# Altium PCB Arduino MEGA blank shield.pcbdoc
Units mil, origin at the board's own origin, x right, y up, seen from the top; angles counter-clockwise.
Board outline 2320 x 2100 mil, 2 copper layers (Top Layer, Bottom Layer); 27 components, 25 nets, 104 pads, 3 vias.
Unrouted connection lines stored in the file: 1.
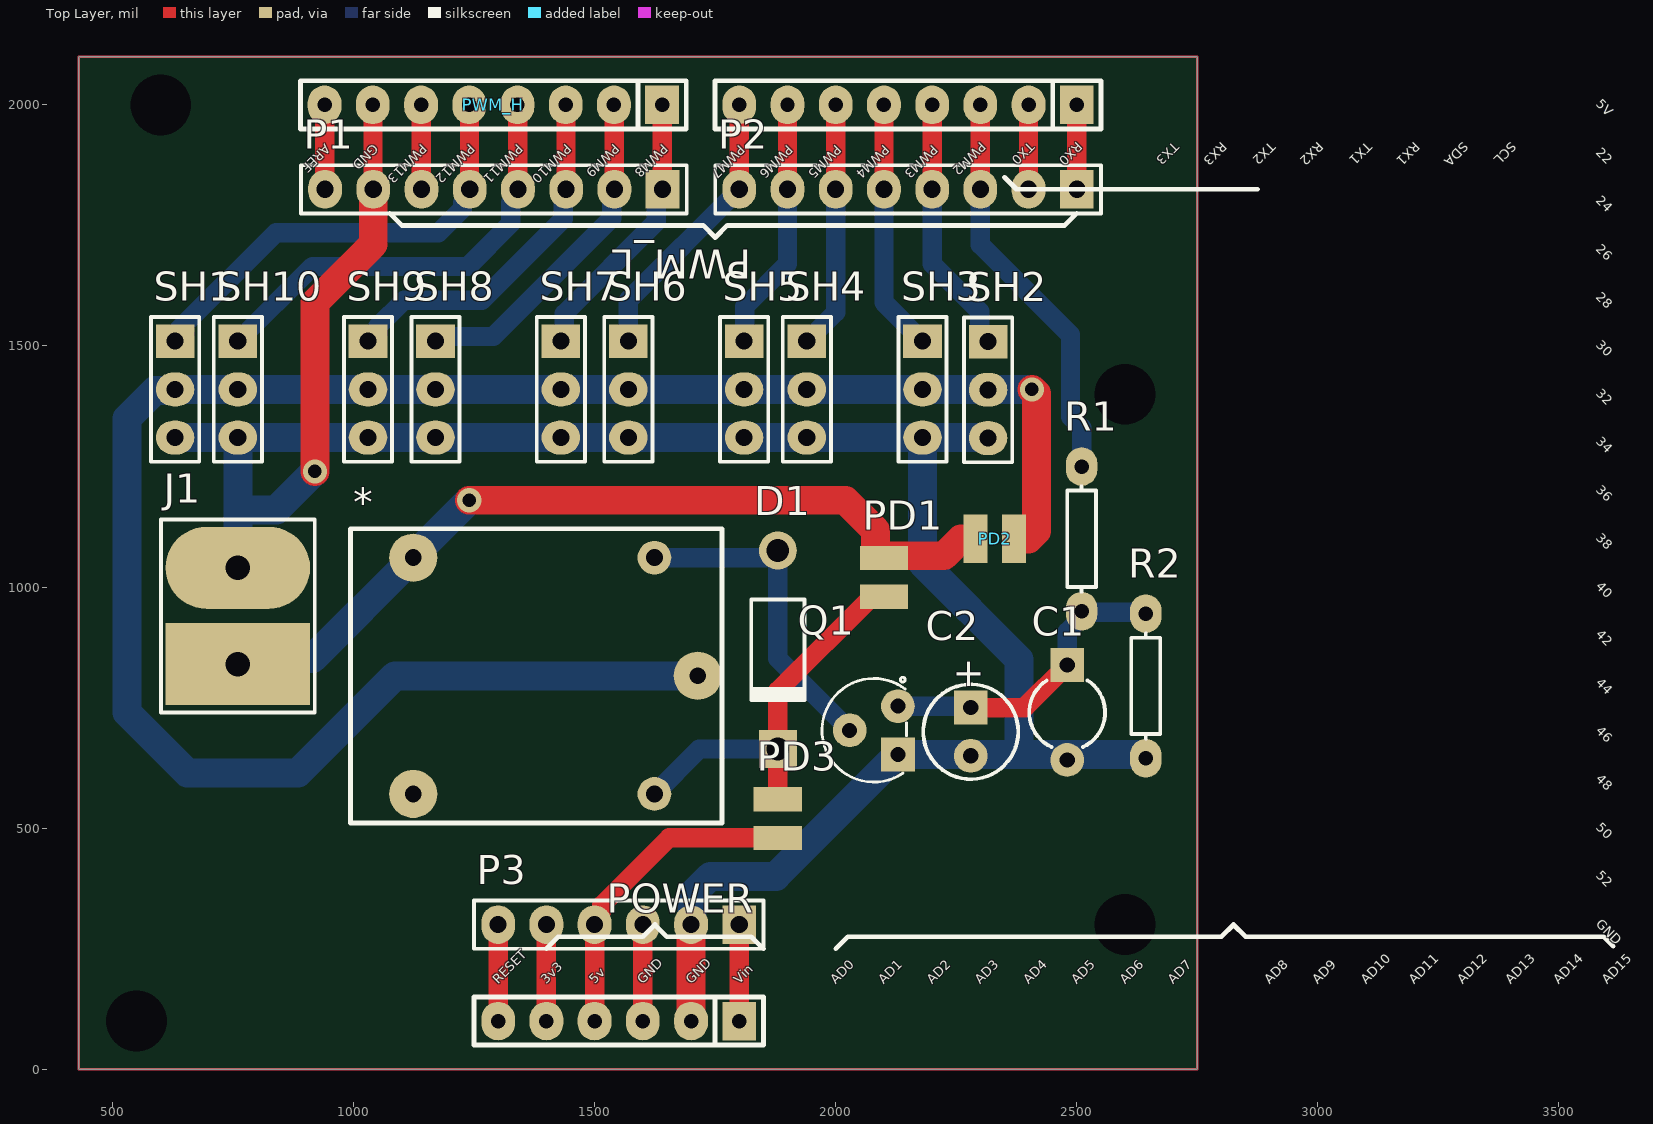
[diagram p0: Top Layer view]
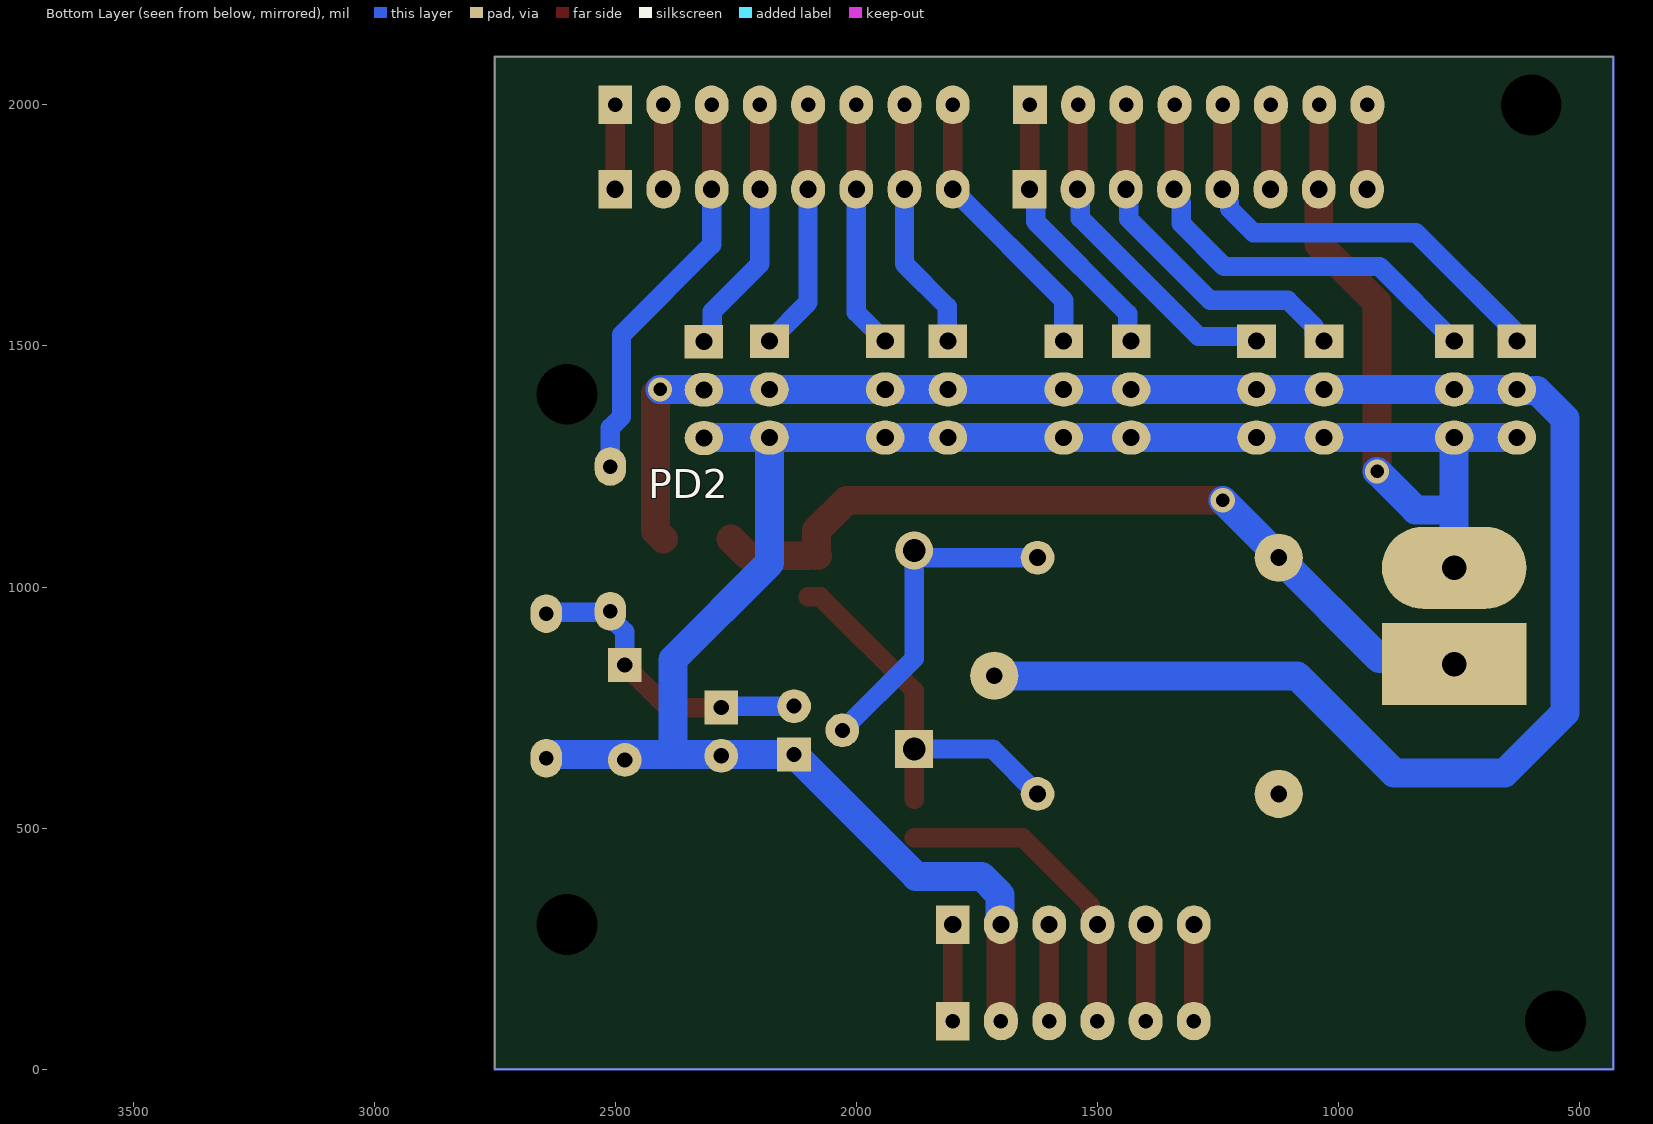
[diagram p1: Bottom Layer view, seen from below]

## Layer stack, top to bottom
Top Solder: solder mask 0.4, Solder Resist, Dk 3.5
Top Layer: signal copper 1.4
Dielectric1: dielectric 12.6, FR-4, Dk 4.8
Bottom Layer: signal copper 1.4
Bottom Solder: solder mask 0.4, Solder Resist, Dk 3.5

## Board outline
430,0 430,2100 2750,2100 2750,0

## Design rules (kind name [scope] priority, off if disabled: settings)
Clearance [All] p1: gap=10 ignorepadtopadclearanceinfootprint=FALSE except(0: Arc-Hole Track-Hole SMDPad-Hole THPad-Hole Via-Hole Fill-Hole Poly-Hole Region-Hole Text-Hole; 30: Arc-Arc Arc-Track Arc-SMDPad Arc-THPad Arc-Via Track-Track Track-SMDPad Track-THPad Track-Via SMDPad-SMDPad SMDPad-THPad SMDPad-Via THPad-THPad THPad-Via Via-Via)
PolygonConnect [All] p1: connectstyle=Relief reliefconductorwidth=10 reliefentries=4 polygonreliefangle="90 Angle" airgapwidth=10
RoomDefinition AdruinoMegaSheild [InComponentClass('AdruinoMegaSheild')] p1: confinementstyle=ConfineOut formatcopy=TRUE lockcomponents=FALSE outline 4200,900 4750,900 4750,1080 4200,1080
RoutingVias [All] p1: holewidth=28 width=50 viastyle="Through Hole" minholewidth=28 minwidth=50 maxholewidth=28 maxwidth=50
SilkToSolderMaskClearance SilkscreenOverComponentPads [IsPad] p1: minsilkscreentomaskgap=10 clearancetoexposedcopper=TRUE
SolderMaskExpansion [All] p1: expansion=4 istentingtop=FALSE
Width Width_PWR [InNet('GND') or InNet('VCC') or InNet('VCC_IN')] p1: maxlimit=70 minlimit=40 preferedwidth=60 minimp=50.000000 maximp=50.000000 favimp=50.000000
Width [All] p2: maxlimit=50 minlimit=30 preferedwidth=40 minimp=50.000000 maximp=50.000000 favimp=50.000000
29 further rules are at their usual default settings.

## Components (designator, comment, footprint, x,y, rotation, side; value= is the part's Value field where it differs from the comment)
* "Relay" Relay 1124,1061 r270 top
C1 "Cap2" CAP2 2480,740 r270 top value=100nF
C2 "Cap1" CAP1 2280,700 r270 top value=10uF
D1 "Diode 1N4007" 1N4007 1880,870 r270 top
J1 "1729128" PHOE-1729128-2_V 760,940 r90 top
P1 "Header 8" HDR1X8 1641,1825 r180 top
P2 "Header 8" HDR1X8 2500,1825 r180 top
P3 "Header 6" HDR1X6 1800,300 r180 top
PD1 "Pad2" PAD2#1 2100,980 r90 top
PD2 "Pad2" PAD2#2 2370,1100 r180 bottom
PD3 "Pad2" PAD2#1 1880,480 r90 top
POWER "POWER" "Header 6x1 8.5mm" 1800,100 r180 top locked
PWM_H "PWM_H" "Header 8x1 8.5mm" 1640,2000 r180 top locked
PWM_L "PWM_L" "Header 8x1 8.5mm" 2500,2000 r180 top locked
Q1 "C828" TO-92_ONS 2129,653 r90 top
R1 "Res1" RES 2510,1100 r270 top value=1K
R2 "Res1" RES 2643,795 r90 top value=10K
SH1 "Header 3" HDR1X3 630,1510 r270 top
SH2 "Header 3" HDR1X3 2316,1509 r270 top
SH3 "Header 3" HDR1X3 2180,1510 r270 top
SH4 "Header 3" HDR1X3 1940,1510 r270 top
SH5 "Header 3" HDR1X3 1810,1510 r270 top
SH6 "Header 3" HDR1X3 1570,1510 r270 top
SH7 "Header 3" HDR1X3 1430,1510 r270 top
SH8 "Header 3" HDR1X3 1170,1510 r270 top
SH9 "Header 3" HDR1X3 1030,1510 r270 top
SH10 "Header 3" HDR1X3 760,1510 r270 top

## Footprints (in the part's own frame and the unit in brackets; to place one, negate y for a bottom-side part, rotate by r counter-clockwise, add the part's x,y. Pads: shape width x height; smd on the part's side, far side on the other; paste and mask are expansions set on the pad)
1N4007 [mm] "Diode, Axial; Body 5.2 x 2.7 mm (LxDia. max), Lead Dia. 0.86 mm (max)"
  round 2 hole 1.2: 1(-5.23,0)
  rect 2x2 hole 1.2: 2(5.23,0)
  silkscreen extent -2.65,-1.4 2.75,1.4, body extent -5.59,-1 5.58,1, height 2.02
CAP1 [mil] "THD, 2-Leads, Dia 5mm, Body Length 11mm"
  rect 70x70 hole 31.5: 1(-50,0)
  round 70 hole 31.5: 2(50,0)
  silkscreen extent -98,-98 98,98, body extent -81,-81 81,81, height 319
CAP2 [mil] "Capacitor; 2 Leads"
  rect 70x70 hole 31.5: 1(-98.43,0)
  round 70 hole 31.5: 2(98.43,0)
  silkscreen extent -66,-79 72,79, body extent -81,-81 81,81, height 319
HDR1X3 [mil] "Connector; Header; 3 Position"
  rect 70x80 hole 35.43: 1(0,0)
  oval 70x80 hole 35.43: 2(100,0) 3(200,0)
  silkscreen extent -50,-50 250,50
HDR1X6 [mil] "Connector; Header; 6 Position"
  rect 70x80 hole 35.43: 1(0,0)
  oval 70x80 hole 35.43: 2(100,0) 3(200,0) 4(300,0) 5(400,0) 6(500,0)
  silkscreen extent -50,-50 550,50
HDR1X8 [mil] "Connector; Header; 8 Position"
  rect 70x80 hole 35.43: 1(0,0)
  oval 70x80 hole 35.43: 2(100,0) 3(200,0) 4(300,0) 5(400,0) 6(500,0) 7(600,0) 8(700,0)
  silkscreen extent -50,-50 750,50
"Header 6x1 8.5mm" [mil] "Stackable 6 pin header"
  rect 70x80 hole 30: 1(0,0)
  oval 70x80 hole 30: 2(100,0) 3(200,0) 4(300,0) 5(400,0) 6(500,0)
  silkscreen extent -50,-50 550,50, body extent -50,-50 550,50, height 335
"Header 8x1 8.5mm" [mil] "Stackable 8 pin header"
  rect 70x80 hole 30: 1(0,0)
  oval 70x80 hole 30: 2(100,0) 3(200,0) 4(300,0) 5(400,0) 6(500,0) 7(600,0) 8(700,0)
  silkscreen extent -50,-50 750,50, body extent -50,-50 750,50, height 335
PAD2#1 [mil]
  rect 50x100 smd: 1(0,0) 2(80,0)
PAD2#2 [mil]
  rect 50x100 smd far side: 1(0,0) 2(80,0)
PHOE-1729128-2_V [mil] "Receptacle, 2-Leads, Body 8.1x10.16mm, Pitch 5.08mm"
  rect 170x300 hole 51.18: 1(-100,0)
  oval 170x300 hole 51.18: 2(100,0)
  silkscreen extent -200,-159 200,159, body extent -222,-159 200,159, height 394
Relay [mil]
  round 100 hole 35: 1(245,590) 2(490,0) 3(0,0)
  round 70 hole 35: 4(0,500) 5(490,500)
  silkscreen extent -60,-130 550,640, body extent -60,-125 550,635, height 600
RES [mil] "Axial Device, Thru-Hole; 2 Leads; 0.3 in Pin Spacing"
  oval 80x65 hole 30: 1(-150,0) 2(150,0)
  silkscreen extent -109,-30 109,30, body extent -161,-46 161,46, height 96
TO-92_ONS [mil]
  rect 70x70 / inner rect 51x51 / far side rect 70x70 hole 31 mask+0: 1(0,0)
  round 70 / inner round 51 / far side round 70 hole 31 mask+0: 2(50,100) 3(100,0)
  silkscreen extent -57,-17 160,157, body extent -52,-11 152,153, height 300

## Part data
C1 C2: "Capacitor", PackageDescription="Capacitor; 2 Leads", PackageReference=CAPR5-4X5, Published=23-Sep-2002, Publisher="Altium Limited"
D1: "1 Amp General Purpose Rectifier", Code_JEDEC=DO-204-AL, ComponentLink1Description="Manufacturer Link", ComponentLink1URL=http://www.fairchildsemi.com/, ComponentLink2Description=Datasheet, ComponentLink2URL=http://www.fairchildsemi.com/ds/1N%2F1N4001.pdf, DatasheetVersion=1998, LatestRevisionDate=17-Jul-2002, LatestRevisionNote="Re-released for DXP Platform.", PackageDescription="Diode, Axial; Body 5.2 x 2.7 mm (LxDia. max), Lead Dia. 0.86 mm (max)", PackageReference=DO-41, PackageVersion=Aug-1999, Published=8-Jun-2000, Publisher="Altium Limited"
J1: library part CMP-2000-05815-1, "PCB Terminal Block, 13.5 A, 400 V, 2-Pin THD, RoHS, Bulk", Current Rating=13500mA, Manufacturer="Phoenix Contact", Package Description="2-Pin Through Hole Device, Body 8.1 x 10.16 mm, Pitch 5.08 mm", Package Reference=1729128-2, Package Version=03/2015, Voltage Rating=400V, Datasheet URL=https://datasheet.ciiva.com/16046/1729128-16046181.pdf, Datasheet Version=12/2013, Manufacturer URL=http://www.phoenixcontact.com/, Mounting Technology=ThroughHole, No. of Positions=2, No. of Rows=1, Orientation=Horizontal, Package URL=https://www.phoenixcontact.com/online/portal/pi/pxc/product_detail_page/!ut/p/b1/3VdJjqNKFDxLH8AFycySyWY2ozFsEPOMMQaDOX1XedGL_1Vdm5YXJleknhSKeBkvI6EA8ncAo3AYoDhBQGco6KN7VURTdemj9us_IEKEZo_YHiPAEWEFmDGOHMORkqKYCORBZxgL7ZoaZYcbFFUZ3fqxSY6GOuxydWUuHqz1ynmMFygu583Bob0Ewr6Sd_l-5m-kAueHiB0jpRwZwe58wwtkpxtMYd_LmGcDRU02dRNEyWt6Y2ti5pSyJ_reIkzIulrqApdnbT11V5jnCKbYNCvhEM1MCpPByat_X379-iThf08CI5GfOPqfBeS3BRoBOdD55AKVv0iLwCMq-2BrzXWSGRH7pUGD9uwXQjiph3xL0DKQwdGa0JImiIOmBNOestqgwTHSSs2oOep-78apyXQBvNi8ZLaFjvjWvcaUEBu0MC6Wbe-d6mB0FAebo2lUWinqYaZs5DAYzV0RP9yitUjnGJ0iI9xhZkT42OCQNUJJhkgWINNQLP2JFP6OpMg3JCVg70jqHT0lvKOnhHf0lPuOnnLf0VPuWx6_dxwUIvwk5WMkT0kLL1mh61l2yZVSzG3pYV_bqo-mj6uMKwKwdnnW8Jh5RTOJzMOA5c-eJDaZQw4mTMPH02PvS_ZAqNVjVTo2WyYLkwH_KU1mmmG5kjRhDqPXLwwVHvVOjCM60-fpXvTDfMGW1PVFVS1r4e4yVDk4ZdNbkUHvqPqQSeian4UD39fNKmachqdJ1NJbyk8rXT9mXTvPk3oE5meulKGgiruPJek-4I9hTT6G8ZLOyRSm2RRVbThERQad5OS28hdt4YW4vG0stgYYzsWsK4_7y6DZMjJSCqri1kyiZR5vD7pwIrNR7QwPHTcLTI5qT7eRlpHrdGiupYlqQDJ7zy_CND8fWWBoLRXxk1RVcXiBQwbTD4Xi7KL-FuO94t9xaqweXzH, Packing=Bulk, PartNumber=1729128, Pitch=5.08mm, RoHS=TRUE
P1 P2: "Header, 8-Pin", LatestRevisionDate=17-Jul-2002, LatestRevisionNote="Re-released for DXP Platform.", Publisher="Altium Limited"
P3: "Header, 6-Pin", LatestRevisionDate=17-Jul-2002, LatestRevisionNote="Re-released for DXP Platform.", Publisher="Altium Limited"
PD1 PD2 PD3: "Square Pad", h=10mil
POWER: Supplier Part Number 1=52553843, Supplier 1=Arrow, Supplier 2=Arrow, Supplier 3=Digi-Key, Supplier 4=Arrow, Supplier 5=Arrow, Supplier Part Number 2=2699075, Supplier Part Number 3=SAM1198-06-ND, Supplier Part Number 4=2699089, Supplier Part Number 5=2699088
PWM_H: Supplier Part Number 1=SAM1198-08-ND, Supplier 1=Digi-Key, Supplier 2=Arrow, Supplier 3=Arrow, Supplier 4=Arrow, Supplier Part Number 2=2698940, Supplier Part Number 3=2698939, Supplier Part Number 4=2698925
PWM_L: Supplier Part Number 1=2698940, Supplier 1=Arrow, Supplier 2=Arrow, Supplier 3=Digi-Key, Supplier 4=Arrow, Supplier Part Number 2=2698939, Supplier Part Number 3=SAM1198-08-ND, Supplier Part Number 4=2698925
Q1: "NPN General Purpose Transistor", ComponentLink1Description="Manufacturer Link", ComponentLink1URL=http://www.fairchildsemi.com/, ComponentLink2Description=Datasheet, ComponentLink2URL=http://www.fairchildsemi.com/ds/2N%2F2N3904.pdf, DatasheetVersion=1997, LatestRevisionDate=15-Jan-2003, LatestRevisionNote="PCB Footprint 'BCY-W3/D4.7' replaced", PackageDescription="TO, Flat Index; 3 In-Line, Axial Leads; Body Dia. 4.5mm; Leads 0.51 x 0.48 mm (max)", PackageReference=TO-92A, PackageVersion=Sep-1998, Published=8-Jun-2000, Publisher="Altium Limited"
R1 R2: "Resistor", LatestRevisionDate=17-Jul-2002, LatestRevisionNote="Re-released for DXP Platform.", PackageDescription="Axial Device, Thru-Hole; 2 Leads; 0.3 in Pin Spacing", PackageReference=AXIAL-0.3, Published=8-Jun-2000, Publisher="Altium Limited"
SH1 SH2 SH3 SH4 SH5 SH6 SH7 SH8 SH9 SH10: "Header, 3-Pin", LatestRevisionDate=17-Jul-2002, LatestRevisionNote="Re-released for DXP Platform.", Publisher="Altium Limited"

## Free pads (board coordinates)
  round 62.99 hole 125.98: 0(550,100) 0(600,2000) 0(2600,300) 0(2600,1400)

## Via types
v1: diameter 50, hole 28, Top Layer to Bottom Layer, 3 vias

## Nets (pads, with @x,y where several pads share a name; then routed paths per layer and width w, separated by ;. In a path a pad name is that pad's centre, name@x,y a point inside that pad or via, vN(x,y) a via of type N, cw(c..) or ccw(c..) an arc to the next point about the centre after c; other vN are vias at no path point)
3V3: P3.5 POWER.5 | length 200
  Top Layer w40: POWER.5 P3.5
5V: P3.4 PD3.1 POWER.4 | length 687.6
  Top Layer w40: POWER.4 P3.4@1500,313.12 ; P3.4 P3.4@1500,313.12 ; PD3.1 1654.79,480 1515,340.21 1515,328.12 P3.4@1500,313.12
  Bottom Layer w40: P3.4 P3.4@1500,305.16
AREF: P1.8 PWM_H.8 | length 175.4
  Top Layer w40: PWM_H.8 940.5,1999.5 940.5,1825.5 P1.8
GND: C1.2 C2.2 J1.2 P1.7 P3.2 P3.3 POWER.2 POWER.3 PWM_H.7 Q1.1 R2.1 SH1.3 SH2.3 SH3.3 SH4.3 SH5.3 SH6.3 SH7.3 SH8.3 SH9.3 SH10.3 | length 5232.3
  Top Layer w40: PWM_H.7 1040.5,1999.5 1040.5,1825.5 P1.7 ; POWER.3 P3.3
  Top Layer w60: v1(920,1240) 920,1590 1041,1711 P1.7 ; POWER.2 P3.2
  Bottom Layer w40: PWM_H.7 PWM_H.7@1040.5,1999.5 ; P1.7@1040.5,1825.5 P1.7
  Bottom Layer w60: SH1.3 SH10.3 ; J1.2 760,1160 ; v1(920,1240) 840,1160 760,1160 ; P3.2 1701.91,301.91 1701.91,361.77 1740.15,400 1876,400 Q1.1 2280,653 2380,653 ; SH2.3 2315,1310 SH3.3 ; R2.1 2643,650.69 2640.69,653 2480,653 2380,653 ; 760,1160 SH10.3 ; SH10.3 SH9.3 SH8.3 SH7.3 SH6.3 SH5.3 SH4.3 SH3.3 ; SH3.3 2180,1050 2380,850 2380,653
Net*_4: *.4 D1.1 Q1.2 | length 696.8
  Bottom Layer w40: *.4 1854.61,1061 1869.52,1075.91 D1.1 1880,852 Q1.2
Net*_5: *.5 D1.2 PD1.1 PD3.2 | length 820.3
  Top Layer w40: PD3.2 1880,785 2075,980 PD1.1
  Bottom Layer w40: *.5 1717.09,664.09 D1.2
NetC1_1: C1.1 C2.1 Q1.3 R1.2 R2.2 | length 646.7
  Top Layer w40: C2.1 2391.57,750 C1.1
  Bottom Layer w40: Q1.3 C2.1@2280,753 ; C1.1 2480,907.52 2510,937.52 R1.2 2512.5,947.5 2640.5,947.5 R2.2
PWM2: P2.3 PWM_L.3 R1.1 | length 837
  Top Layer w40: P2.3 PWM_L.3
  Bottom Layer w40: P2.3 2300,1710 2487.01,1522.99 2487.01,1353.2 2510,1330.2 R1.1
PWM3: P2.4 PWM_L.4 SH2.1 | length 540.5
  Top Layer w40: P2.4 PWM_L.4
  Bottom Layer w40: P2.4 2200,1670 2298.57,1571.43 2298.57,1524 2313.57,1509 SH2.1
PWM4: P2.5 PWM_L.5 SH3.1 | length 523.1
  Top Layer w40: P2.5 PWM_L.5
  Bottom Layer w40: P2.5 2100,1590 SH3.1
PWM5: P2.6 PWM_L.6 SH4.1 | length 514.9
  Top Layer w40: P2.6 PWM_L.6
  Bottom Layer w40: SH4.1 2000,1570 P2.6
PWM6: P2.7 PWM_L.7 SH5.1 | length 527.3
  Top Layer w40: P2.7 PWM_L.7
  Bottom Layer w40: SH5.1 1811.57,1511.57 1811.57,1581.57 1900,1670 P2.7
PWM7: P2.8 PWM_L.8 SH6.1 | length 585.7
  Top Layer w40: P2.8 PWM_L.8
  Bottom Layer w40: SH6.1 1569.53,1510.47 1569.53,1594.53 P2.8
PWM8: P1.1 PWM_H.1 SH7.1 | length 577.8
  Top Layer w40: PWM_H.1 1640.5,1999.5 1640.5,1825.5 P1.1
  Bottom Layer w40: SH7.1 1436.95,1516.95 1436.95,1566.95 1628.07,1758.07 1628.07,1812.07 P1.1
PWM9: P1.2 PWM_H.2 SH8.1 | length 708.6
  Top Layer w40: PWM_H.2 1540.5,1999.5 1540.5,1825.5 P1.2
  Bottom Layer w40: SH8.1 1179.53,1519.53 1289.72,1519.53 1535.26,1765.07 1535.26,1819.26 P1.2
PWM10: P1.3 PWM_H.3 SH9.1 | length 758
  Top Layer w40: PWM_H.3 1440.5,1999.5 1440.5,1825.5 P1.3
  Bottom Layer w40: SH9.1 1035,1510 1050,1525 1050,1540 1105,1595 1266.2,1595 1435.26,1764.06 1435.26,1819.26 P1.3
PWM11: P1.4 PWM_H.4 SH10.1 | length 919.8
  Top Layer w40: PWM_H.4 1340.5,1999.5 1340.5,1825.5 P1.4
  Bottom Layer w40: SH10.1 915,1665 1237.2,1665 1326,1753.8 1326,1796.88 1341,1811.88 P1.4
PWM12: P1.5 PWM_H.5 SH1.1 | length 967.1
  Top Layer w40: PWM_H.5 1240.5,1999.5 1240.5,1825.5 P1.5
  Bottom Layer w40: SH1.1@650,1525 635,1510 SH1.1 630,1525.71 839.29,1735 1176.21,1735 1226,1784.79 1226,1796.88 1241,1811.88 P1.5
PWM13: P1.6 PWM_H.6 | length 175.4
  Top Layer w40: PWM_H.6 1140.5,1999.5 1140.5,1825.5 P1.6
RESET: P3.6 POWER.6 | length 200
  Top Layer w40: POWER.6 P3.6
RX0: P2.1 PWM_L.1 | length 175
  Top Layer w40: P2.1 PWM_L.1
TX0: P2.2 PWM_L.2 | length 175
  Top Layer w40: P2.2 PWM_L.2
VCC: *.1 PD2.1 SH1.2 SH2.2 SH3.2 SH4.2 SH5.2 SH6.2 SH7.2 SH8.2 SH9.2 SH10.2 | length 4151.8
  Top Layer w60: 2400,1100 2416,1116 2416,1401.01 v1(2407.01,1410)
  Bottom Layer w60: *.1 1086,816 884.85,614.85 655.15,614.85 530,740 530,1349.35 588.74,1408.09 628.09,1408.09 SH1.2 SH10.2 SH9.2 SH8.2 SH7.2 SH6.2 SH5.2 SH4.2 SH3.2 2315,1410 SH2.2 2317,1410 v1(2407.01,1410)
VCC_IN: *.3 J1.1 PD1.2 PD2.2 | length 1720.7
  Top Layer w60: v1(1240,1180) 2020,1180 2082.65,1117.35 2082.65,1065 PD1.2@2080,1065 ; PD1.2@2100,1065 2225,1065 2260,1100
  Bottom Layer w60: J1.1 771.85,851.85 914.85,851.85 *.3 1124,1064 v1(1240,1180)
VIN: P3.1 POWER.1 | length 200
  Top Layer w40: POWER.1 P3.1
pads on no net: *.2
copper on no net: | length 17680
  Top Layer w5: 430,0 430,2100 2750,2100 2750,0 430,0
  Bottom Layer w5: 430,0 430,2100 2750,2100 2750,0 430,0

## Silkscreen, mask and mechanical layers (free items; w line width, h text height)
Top Overlay:
  lines w10: 1075,1775 1100,1750 1725,1750 1750,1725 1775,1750 2475,1750 2500,1775 ; 1400,250 1425,275 1600,275 1625,300 1650,275 1825,275 1850,250 ; 2000,250 2025,275 2800,275 2825,300 2850,275 3592.93,275 3612.7,255.23 ; 2350,1850 2375,1825 2875,1825
  text "5V" at 3575,2000 h20 r315
  text "5V" at 3875,1975 h20 r45
  text "PWM2" at 2300,1925 h20 r225
  text "TX0" at 2400,1925 h20 r225
  text "RX0" at 2500,1925 h20 r225
  text "TX3" at 2700,1925 h20 r225
  text "RX3" at 2800,1925 h20 r225
  text "TX2" at 2900,1925 h20 r225
  text "RX2" at 3000,1925 h20 r225
  text "TX1" at 3100,1925 h20 r225
  text "RX1" at 3200,1925 h20 r225
  text "SDA" at 3300,1925 h20 r225
  text "SCL" at 3400,1925 h20 r225
  text "AREF" at 940,1920 h20 r225
  text "GND" at 1040,1920 h20 r225
  text "PWM13" at 1140,1920 h20 r225
  text "PWM12" at 1240,1920 h20 r225
  text "PWM11" at 1340,1920 h20 r225
  text "PWM10" at 1440,1920 h20 r225
  text "PWM9" at 1540,1920 h20 r225
  text "PWM8" at 1640,1920 h20 r225
  text "PWM7" at 1800,1917.93 h20 r225
  text "PWM6" at 1900,1917.93 h20 r225
  text "PWM5" at 2000,1917.93 h20 r225
  text "PWM4" at 2100,1917.93 h20 r225
  text "PWM3" at 2200,1917.93 h20 r225
  text "22" at 3575,1900 h20 r315
  text "23" at 3875,1875 h20 r45
  text "24" at 3575,1800 h20 r315
  text "25" at 3875,1775 h20 r45
  text "26" at 3575,1700 h20 r315
  text "27" at 3875,1675 h20 r45
  text "28" at 3575,1600 h20 r315
  text "29" at 3875,1575 h20 r45
  text "30" at 3575,1500 h20 r315
  text "31" at 3875,1475 h20 r45
  text "32" at 3575,1400 h20 r315
  text "33" at 3875,1375 h20 r45
  text "34" at 3575,1300 h20 r315
  text "35" at 3875,1275 h20 r45
  text "36" at 3575,1200 h20 r315
  text "37" at 3875,1175 h20 r45
  text "38" at 3575,1100 h20 r315
  text "39" at 3875,1075 h20 r45
  text "40" at 3575,1000 h20 r315
  text "41" at 3875,975 h20 r45
  text "42" at 3575,900 h20 r315
  text "43" at 3875,875 h20 r45
  text "44" at 3575,800 h20 r315
  text "45" at 3875,775 h20 r45
  text "46" at 3575,700 h20 r315
  text "47" at 3875,675 h20 r45
  text "48" at 3575,600 h20 r315
  text "49" at 3875,575 h20 r45
  text "50" at 3575,500 h20 r315
  text "51" at 3875,475 h20 r45
  text "52" at 3575,400 h20 r315
  text "53" at 3875,375 h20 r45
  text "GND" at 3575,300 h20 r315
  text "GND" at 3875,275 h20 r45
  text "RESET" at 1300,175 h20 r45
  text "3v3" at 1400,175 h20 r45
  text "5v" at 1500,175 h20 r45
  text "GND" at 1600,175 h20 r45
  text "GND" at 1700,175 h20 r45
  text "Vin" at 1800,175 h20 r45
  text "AD0" at 2000,175 h20 r45
  text "AD1" at 2100,175 h20 r45
  text "AD2" at 2200,175 h20 r45
  text "AD3" at 2300,175 h20 r45
  text "AD4" at 2400,175 h20 r45
  text "AD5" at 2500,175 h20 r45
  text "AD6" at 2600,175 h20 r45
  text "AD7" at 2700,175 h20 r45
  text "AD8" at 2900,175 h20 r45
  text "AD9" at 3000,175 h20 r45
  text "AD10" at 3100,175 h20 r45
  text "AD11" at 3200,175 h20 r45
  text "AD12" at 3300,175 h20 r45
  text "AD13" at 3400,175 h20 r45
  text "AD14" at 3500,175 h20 r45
  text "AD15" at 3600,175 h20 r45
Mechanical 1:
  circle w5: c3800,100 r62.99
  circle w5: c3550,2000 r62.99
  circle w5: c2600,1400 r62.99
  circle w5: c550,100 r62.99
  circle w5: c2600,300 r62.99
  circle w5: c600,2000 r62.99
  lines w5: 0,2100 0,0 3900,0 3900,50 4000,150 4000,1500 3900,1600 3900,2000 3800,2100

## Text inside footprints (layer, text, board x,y; h text height)
C2: Top Overlay "+" at 2250.98,853.86 h59.06 r270